# Altium PCB MCUDEV_TFT_144.PcbDoc
Units mil, origin at the board's own origin, x right, y up, seen from the top; angles counter-clockwise.
Board outline 8050 x 7430 mil, 2 copper layers (Top Layer, Bottom Layer); 10 components, 11 nets, 46 pads, 0 vias.
Unrouted connection lines stored in the file: 22.
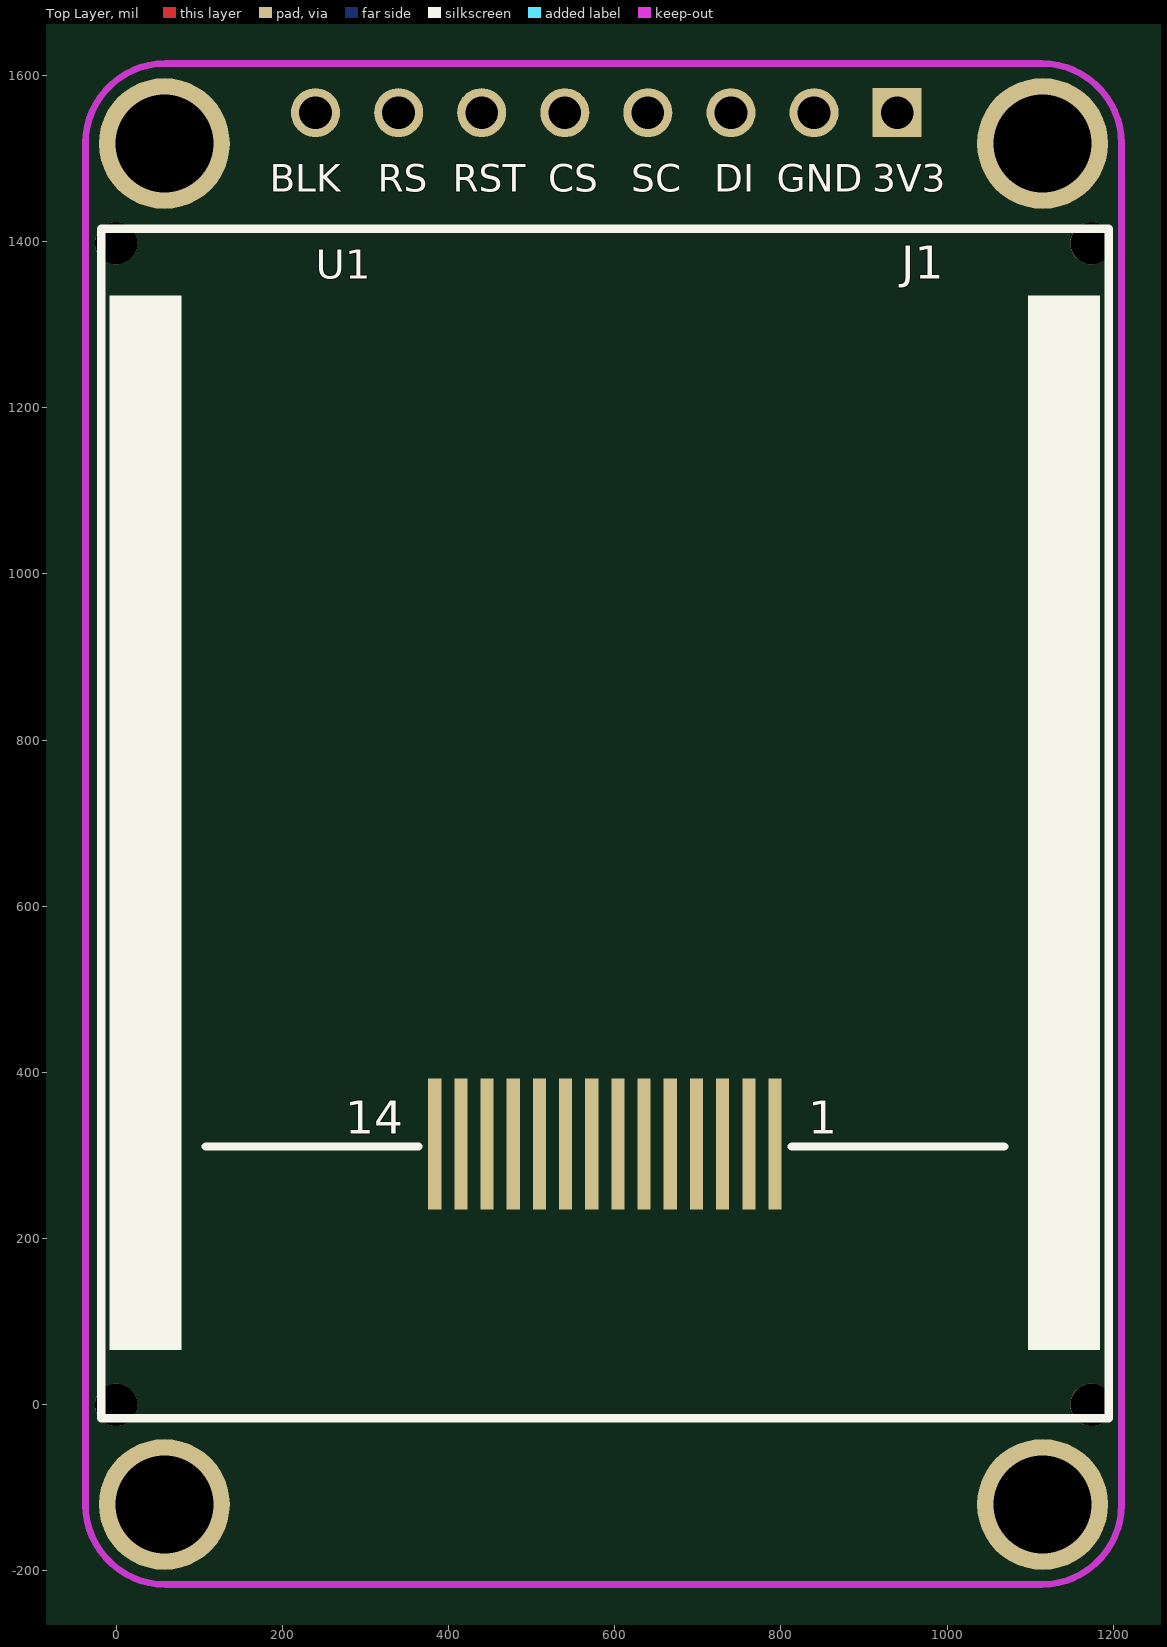
[diagram p0: Top Layer view]
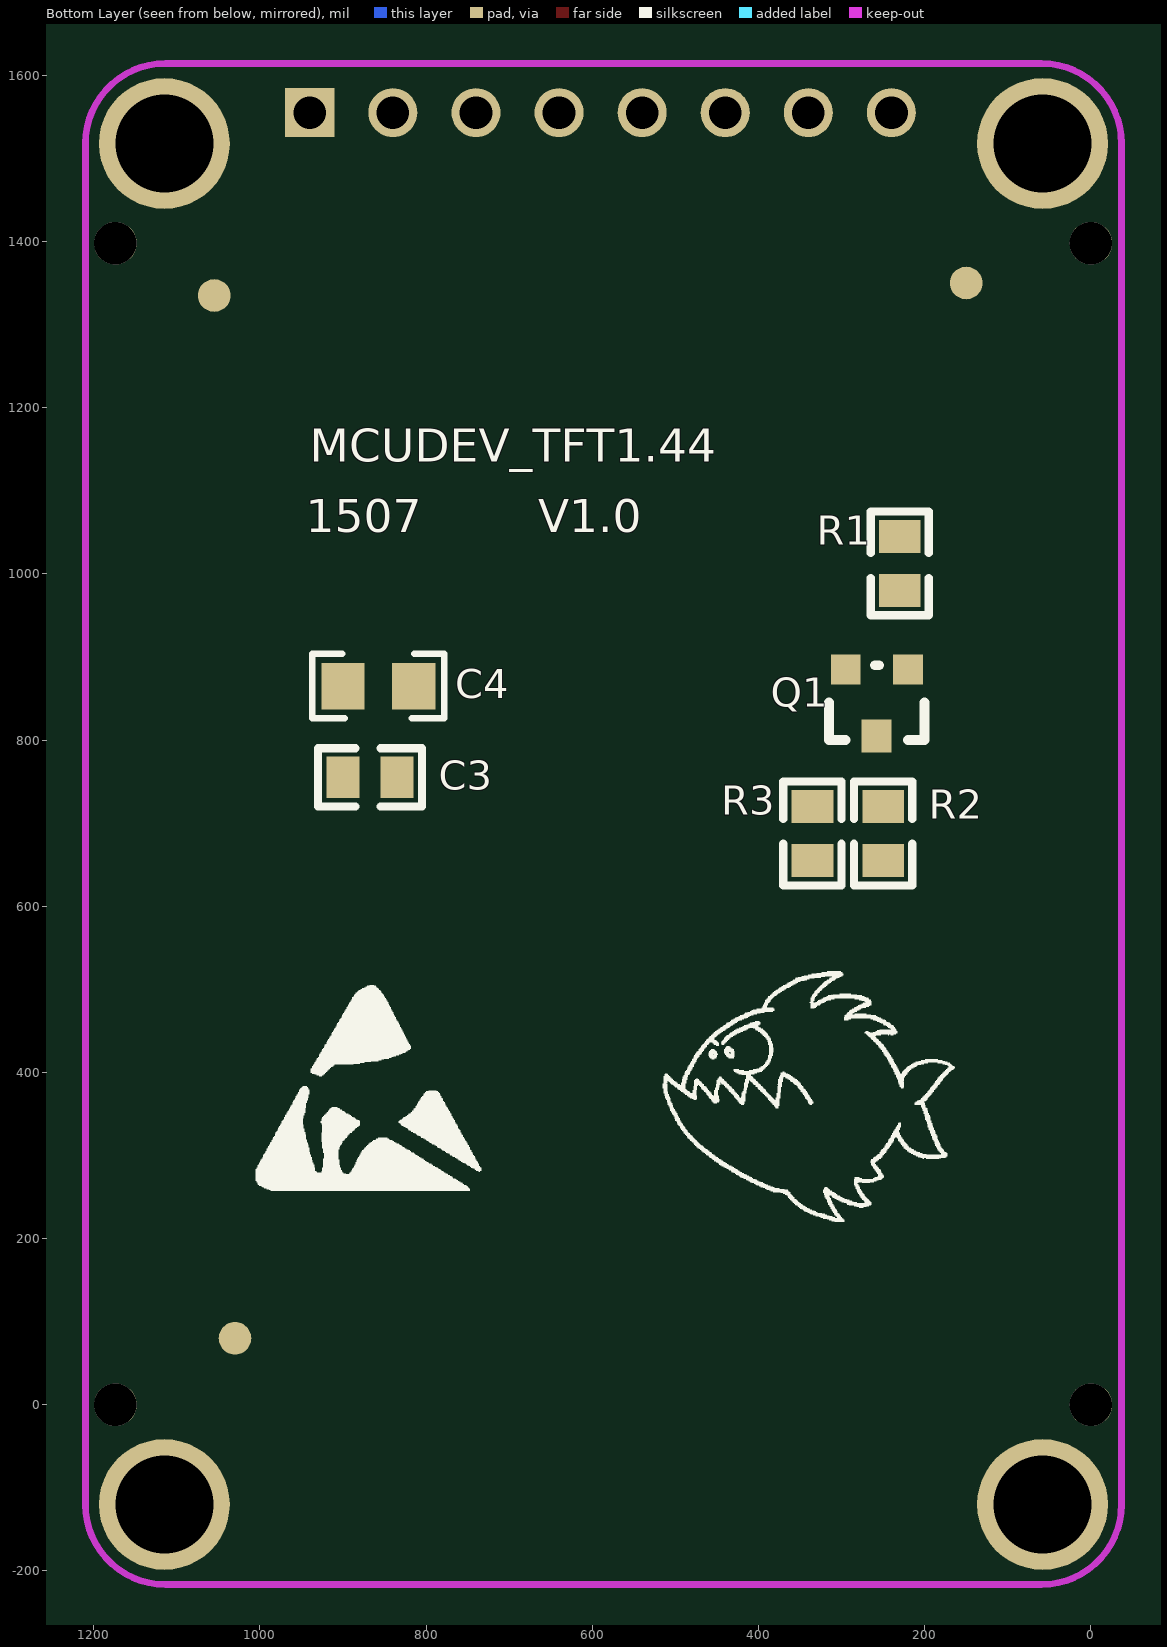
[diagram p1: Bottom Layer view, seen from below]

## Layer stack, top to bottom
Top Layer: signal copper 1.4
Dielectric: dielectric 12.6, FR-4, Dk 4.8
Bottom Layer: signal copper 1.4

## Board outline
-1930.13,-2301.26 -1930.13,5128.74 6119.87,5128.74 6119.87,-2301.26

## Design rules (kind name [scope] priority, off if disabled: settings)
Clearance [All] p1: gap=20
ComponentClearance [All] p1: gap=5 collisioncheckmode=3 verticalgap=5 showdistances=FALSE
FabricationTestPointUsage TestPointUsage [All] p1: valid=0 allowmultiple=FALSE
FabricationTestpoint Testpoint [All] p1: side=3 testpointundercomponent=TRUE minsize=40 maxsize=100 preferedsize=60 minholesize=0 maxholesize=40 preferedholesize=32 testpointgrid=1 allowsidetop=TRUE allowsidebottom=TRUE usegrid=TRUE gridtolerance=0.01
HoleToHoleClearance [All] p1: gap=3.94 allowstackedmicrovias=TRUE
MinimumSolderMaskSliver [All] p1: minsoldermaskwidth=3.94
PlaneConnect PlaneConnect_1 [All] p1: planeconnectstyle=Direct reliefexpansion=20 reliefentries=4 reliefconductorwidth=10 reliefairgap=10
PlaneConnect [All] p2: planeconnectstyle=Relief reliefexpansion=20 reliefentries=4 reliefconductorwidth=10 reliefairgap=10
PolygonConnect PolygonConnect_1 [(InPadClass('All Pads'))] p1: connectstyle=Relief reliefconductorwidth=10 reliefentries=4 polygonreliefangle="90 Angle"
PolygonConnect [All] p2: connectstyle=Direct reliefconductorwidth=10 reliefentries=4 polygonreliefangle="90 Angle"
RoutingVias [All] p1: holewidth=16 width=30 viastyle="Through Hole" minholewidth=16 minwidth=30 maxholewidth=16 maxwidth=30
SilkToSilkClearance [All] p1: silktosilkclearance=3.94
SilkscreenOverComponentPads [All] p1: minsilkscreentomaskgap=3.94
SolderMaskExpansion [All] p1: expansion=4
Width [All] p1: maxlimit=40 minlimit=10 preferedwidth=10
20 further rules are at their usual default settings.

## Classes and differential pairs
component class MCUDEV_TFT_144: C3 C4 J1 Q1 R1 R2 R3 U1

## Components (designator, comment, footprint, x,y, rotation, side; value= is the part's Value field where it differs from the comment)
C3 "104" RC0603 900,755 r180 bottom
C4 "106" RC0805 900,865 r180 bottom
J1 "OLED" LCD_SPI8 940,1555 r180 top
Q1 "8050" NPN 220,885 r0 bottom
R1 "1K" RC0603 230,980 r90 bottom
R2 "10R" RC0603 250,720 r270 bottom
R3 "10R" RC0603 335,720 r270 bottom
U1 "TFT177PF254" TFT177PF254 -20.13,-21.26 r0 top locked
? "Comment" LOG_JD 869.74,307.53 r180 bottom
? "Comment" LOG_SY 345,380 r0 bottom

## Footprints (in the part's own frame and the unit in brackets; to place one, negate y for a bottom-side part, rotate by r counter-clockwise, add the part's x,y. Pads: shape width x height; smd on the part's side, far side on the other; paste and mask are expansions set on the pad)
LCD_SPI8 [mm]
  rect 1.5x1.5 hole 1: 1(0,0)
  round 1.5 hole 1: 2(2.54,0) 3(5.08,0) 4(7.62,0) 5(10.16,0) 6(12.7,0) 7(15.24,0) 8(17.78,0)
LOG_JD [mil]
  silkscreen extent -135,-50 136,197
LOG_SY [mil]
  silkscreen extent -181,-141 170,160
NPN [mil]
  rect 36x36 smd: 1(0,0) 3(75,0)
  rect 36x40 smd: 2(38,80)
  silkscreen extent -20,-5 95,85
RC0603 [mil]
  rect 40x50 smd: 1(0,0) 2(65,0)
  silkscreen extent -30,-35 95,35
RC0805 [mil]
  rect 52x56 smd: 1(0,0) 2(85,0)
  silkscreen extent -37,-39 122,39
TFT177PF254 [mm]
  rect 0.4x4 smd: 1(20.652,8.514) 2(19.852,8.514) 3(19.052,8.514) 4(18.252,8.514) 5(17.452,8.514) 6(16.652,8.514) 7(15.852,8.514) 8(15.052,8.514) 9(14.252,8.514) 10(13.452,8.514) 11(12.652,8.514) 12(11.852,8.514) 13(11.052,8.514) 14(10.252,8.514)
  round 1.3 hole 1.3 unplated: ""(0.511,0.54) ""(0.511,36.046) ""(30.329,0.54) ""(30.329,36.046)
  silkscreen extent 0.05,0.13 30.85,36.49

## Part data
C3 C4: library part CAP, "Capacitor"
J1: library part "Header 8", "Header, 8-Pin"
Q1: library part 2N3904, "NPN General Purpose Amplifier"
R1 R2 R3: library part Res2, "Resistor"

## Free pads (board coordinates)
  round 157.48 hole 118.11: ""(58.1,-120) ""(58.1,1517.87) ""(1115,-120) ""(1115,1517.87)
  round 39.37 smd far side: ""(150,1350) ""(1030,80) ""(1055,1335)

## Nets (pads, with @x,y where several pads share a name; then routed paths per layer and width w, separated by ;. In a path a pad name is that pad's centre, name@x,y a point inside that pad or via, vN(x,y) a via of type N, cw(c..) or ccw(c..) an arc to the next point about the centre after c; other vN are vias at no path point)
3V3: C3.1 C4.1 J1.1 U1.4 U1.10 U1.11
BLK: J1.8 R1.2
BLK_K: R2.2 R3.2 U1.3
CS: J1.5 U1.12
GND: C3.2 C4.2 J1.2 Q1.3 R3.1 U1.2 U1.5 U1.13
NetQ1_1: Q1.1 R1.1
NetQ1_2: Q1.2 R2.1
RS: J1.7 U1.7
RST: J1.6 U1.6
SCL: J1.4 U1.9
SDI: J1.3 U1.8
pads on no net: U1. U1.1 U1.14

## Keep-outs
Keep-Out Layer:
  lines w8: -36.9,-120 ccw(c59.5,-120) 59.5,-216.4 1113.6,-216.4 ccw(c1113.6,-120) 1210,-120 1210,1517.87 ccw(c1113.6,1517.87) 1113.6,1614.27 59.5,1614.27 ccw(c59.5,1517.87) -36.9,1517.87 -36.9,-120

## Silkscreen, mask and mechanical layers (free items; w line width, h text height)
Top Overlay:
  text "BLK" at 185,1460 h33
  text "RS" at 315,1460 h33
  text "RST" at 405,1460 h33
  text "CS" at 520,1460 h33
  text "SC" at 620,1460 h33
  text "DI" at 720,1460 h33
  text "GND" at 795,1460 h33
  text "3V3" at 910,1460 h33
Bottom Overlay:
  text "MCUDEV_TFT1.44" at 940,1135 h40
  text "V1.0" at 665.26,1050 h40
  text "1507" at 945,1050 h40

## Dimensions
58.1,1517.87 to 58.1,-120 on Top Overlay
58.1,1517.87 to 1115,1517.87 on Top Overlay
1113.6,1614.27 to 1113.6,-216.4 on Top Overlay
-36.9,-120 to 1210,-120 on Top Overlay

## Text inside footprints (layer, text, board x,y; h text height)
U1: Top Overlay "14" at 275.97,325.94 h40; Top Overlay "1" at 832.97,325.94 h40